# EAGLE board openSX70-FTDI-232RL-Basic-5V (EAGLE 9.1.1)
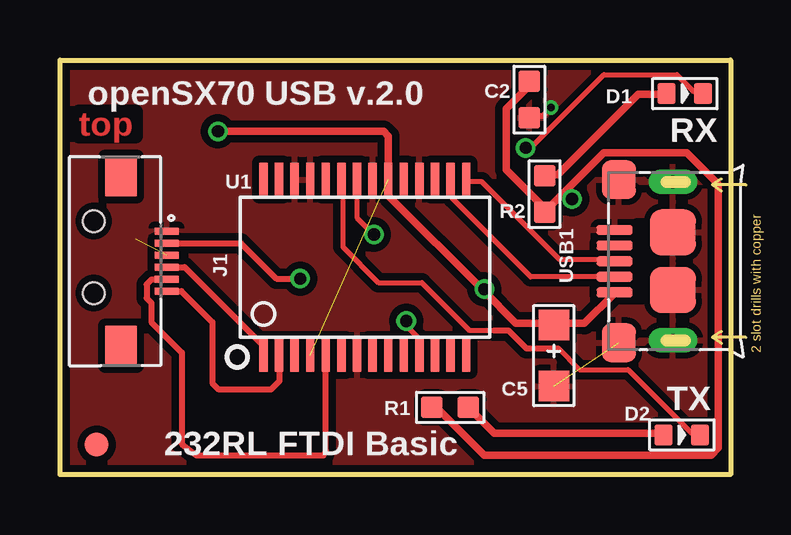
[diagram p0: board, top side]
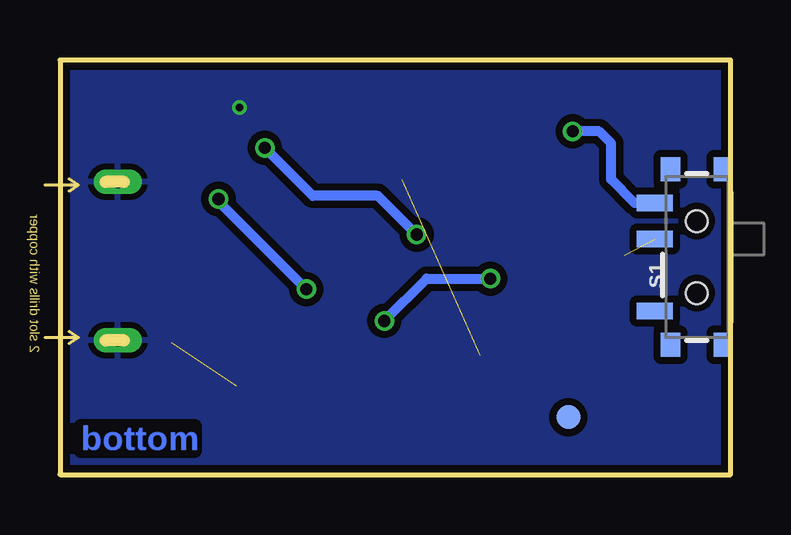
[diagram p1: board, bottom side, seen from below]

Size 27.94 x 17.27 mm. Coordinates in mm from the lower left corner, seen from the top.
Outline: 0,17.27 27.94,17.27 27.94,0 0,0 0,17.27
Copper layers (1*16): Top 0.035mm / dielectric 1.5mm / Bottom 0.035mm
Design rules "SeeedStudio_2layer_DRU_no_angle_20140221": minimum track width 6mil, minimum drill 12mil, track to track 6mil, track to pad 6mil, pad to pad 6mil, via to via 6mil, smd to smd 0mil, copper to edge 10mil, drill to drill 10mil, minimum pad ring 10mil, minimum via ring 6mil, stop-mask expansion 2mil, vias tented up to drill 100mil, thermal gap 10mil
Net classes: 0 default: width 0.203 mm; 1 power: width 0.254 mm

## Footprints (pad centres in the part's own frame; a part is rotated, then mirrored left to right if it is on the bottom)
C0603 = smd 0.889 x 0.889: 1 0,0.762; 2 0,-0.762
AVX-A = smd 1.27 x 1.27: + -1.27,0; - 1.27,0
LED-0603 = smd 0.762 x 0.889: + -0.762,0; - 0.762,0
687106183722 = smd 0.3 x 1: 1 -1.25,1.9; 2 -0.75,1.9; 3 -0.25,1.9; 4 0.25,1.9; 5 0.75,1.9; 6 1.25,1.9 | smd 1.65 x 1.3: Z1 -3.525,0; Z2 3.525,0
FIDUCIAL-1X2 = smd 1 x 1: 1 0,0
R0603 = smd 0.889 x 0.889: 1 0,0.762; 2 0,-0.762
SWITCH_SPST_SMD_A = smd 0.7 x 1.5: 1 -2.25,-1.75; 2 -0.75,-1.75; 3 2.25,-1.75 | smd 1 x 0.6: GND1 -3.65,1; GND3 3.65,1 | smd 1 x 0.8: GND2 -3.65,-1.1; GND4 3.65,-1.1 | hole 0.9: -1.5,0; 1.5,0
SSOP28DB = smd 0.348 x 1.397: 1 -4.225,-3.656; 2 -3.575,-3.656; 3 -2.925,-3.656; 4 -2.275,-3.656; 5 -1.625,-3.656; 6 -0.975,-3.656; 7 -0.325,-3.656; 8 0.325,-3.656; 9 0.975,-3.656; 10 1.625,-3.656; 11 2.275,-3.656; 12 2.925,-3.656; 13 3.575,-3.656; 14 4.225,-3.656; 15 4.225,3.656; 16 3.575,3.656; 17 2.925,3.656; 18 2.275,3.656; 19 1.625,3.656; 20 0.975,3.656; 21 0.325,3.656; 22 -0.325,3.656; 23 -0.975,3.656; 24 -1.625,3.656; 25 -2.275,3.656; 26 -2.925,3.656; 27 -3.575,3.656; 28 -4.225,3.656
MICRO-USB5+6P-SMD-0.65-B = smd 0.4 x 1.5: 1 -1.3,-0.25; 2 -0.65,-0.25; 3 0,-0.25; 4 0.65,-0.25; 5 1.3,-0.25 | smd 1.6 x 1.4: S1 -3.4,-0.427; S6 3.4,-0.427 | drill 0.508 pad 1.016 long: S2 -3.3,-2.675; S5 3.3,-2.675 | smd 1.9 x 1.9: S3 -1.2,-2.675; S4 1.2,-2.675

## Placement (x,y rotation side)
C2  100nf  [C0603]  19.56,15.62 0 top
C5  10uf  [AVX-A]  20.57,4.95 270 top
D1  GREEN-0603  [LED-0603]  26.03,15.88 0 top
D2  YELLOW-0603  [LED-0603]  25.91,1.65 0 top
FRAME1  FRAME-LETTER  [CREATIVE_COMMONS]  -4.5,-10.16 0 top  (outside the outline)
J1  687106183722  [687106183722]  2.54,8.89 270 top
JP3  FIDUCIAL1X2  [FIDUCIAL-1X2]  1.52,1.24 0 top
JP5  FIDUCIAL1X2  [FIDUCIAL-1X2]  6.76,2.39 0 bottom
R1  1K  [R0603]  16.26,2.79 270 top
R2  1K  [R0603]  20.19,11.68 0 top
S1  [SWITCH_SPST_SMD_A]  1.41,9.06 270 bottom
U1  FT232RLSSOP  [SSOP28DB]  12.7,8.64 0 top
USB1  10118193-0001LF  [MICRO-USB5+6P-SMD-0.65-B]  22.86,8.89 90 top

## Library data of the parts
C2 = openSX70_PATHFINDER_V5.5-SEEED_20180522; MPN: CC0603KRX7R9BB104
C5 = Seeed-Capacitor-2016; MPN: TAJA106K016RNJ
D1 = Seeed-LED; MPN: 19-217-G7C-AN1P2-3T
D2 = Seeed-LED-2016; MPN: 19-217-Y5C-AM1N1VY-3T
FRAME1 = SparkFun-Aesthetics
J1 = openSX70_PATHFINDER_V5.5-SEEED_20180522; AVAILABILITY: Good; DESCRIPTION: CONN FFC BTM 6POS 0.5MM SMD R/A; MF: Wurth Electronics; MP: 687106183722; PACKAGE: None; PRICE: 1.21 USD
JP3 JP5 U1 = SparkFun
R1 R2 = openSX70_PATHFINDER_V5.5-SEEED_20180522; MPN: RC0603FR-071KL
S1 = SparkFun-Switches; PROD_ID: SWCH-10651; SF_SKU: COM-10860
USB1 = Seeed-Connector -2016; MPN: 10118193-0001LF

## Nets
5V: C2.1 C5.+ R1.2 R2.2 S1.1 USB1.1
CTS: J1.2 U1.11
DTR: J1.6 U1.2
GND [power]: C2.2 C5.- J1.1 U1.7 U1.18 U1.21 U1.25 U1.26 USB1.5 USB1.S1 USB1.S2 USB1.S3 USB1.S4 USB1.S5 USB1.S6
N$1: D2.+ R1.1
N$2: D1.+ R2.1
N$3: U1.16 USB1.2
N$4: U1.4 U1.20
N$5: J1.3 S1.2
RXI: J1.5 U1.5
RXLED: D1.- U1.22
TXLED: D2.- U1.23
TXO: J1.4 U1.1
USB_D+: U1.15 USB1.3

## Tracks (layer width: path | path; a pad name or v marks a point on that pad's centre or on a via)
5V  (via drill 0.51)
  Top 0.203: 20.62,6.3 C5.+ 20.52,6.3 | 23.06,7.52 USB1.1 | 13.72,11.58 13.72,12.19 | 15.75,2.74 15.54,2.74 R1.2 | 20.22,10.97 R2.2 20.22,11.07 | 19.51,16.15 19.51,16.36 C2.1 | 21.03,11.79 v21.34,11.48 | v17.68,7.72 17.63,7.67
  Top 0.254: 13.68,12.23 13.72,12.19
  Top 0.305: 20.62,6.3 21.84,6.3 23.06,7.52 | 13.72,11.58 17.63,7.67 19,6.3 20.52,6.3 | 15.75,2.74 17.68,0.81 27.13,0.81 27.43,1.12 27.43,12.09 26.11,13.41 22.66,13.41 21.03,11.79 20.22,10.97 | 19.51,16.15 18.59,15.24 18.59,12.7 20.22,11.07 | v6.58,14.3 13.48,14.3 13.68,14.1 13.68,12.23
  Bottom 0.305: S1.1 3.99,11.31 | 21.34,11.38 v21.34,11.48
  Bottom 0.406: v6.58,14.3 5.48,14.3 4.98,13.8 4.98,12.3 3.99,11.31 | v17.68,7.72 21.34,11.38
CTS  (via drill 0.51)
  Top 0.203: v14.43,6.4 14.43,6.2 14.94,5.69 14.94,5.08 U1.11
  Top 0.254: J1.2 7.54,9.64 9.02,8.16 v10.01,8.16
  Bottom 0.406: v10.01,8.16 12.66,8.16 v14.43,6.4
DTR
  Top 0.254: U1.2 arc-90 9.14,4.96 9.14,3.89 8.79,3.54 6.62,3.54 6.35,3.81 6.35,6.35 5.06,7.64 J1.6
GND  (via drill 0.3)  (1 unrouted)
  Top 0.254: v20.46,15.29 20.1,14.94 19.57,14.94 C2.2
  pour Bottom (isolate 0.305): 0,-0.03 0,17.3 27.94,17.3 27.94,-0.03
  pour Top (isolate 0.305): 0,-0.03 0,17.3 27.94,17.3 27.94,-0.03
N$1
  Top 0.203: 25.09,1.73 D2.+
  Top 0.305: 25.09,1.73 18.09,1.73 R1.1
N$2
  Top 0.203: 20.22,12.5 R2.1 | 25.2,15.85 D1.+
  Top 0.305: 20.22,12.5 20.73,12.5 24.09,15.85 25.2,15.85
N$3
  Top 0.203: U1.16 16.36,12.19 16.36,11.48 19.61,8.23 USB1.2
N$4  (1 unrouted)
N$5  (1 unrouted)
RXI
  Top 0.254: J1.5 4.42,8.12 3.8,8.12 3.61,7.93 3.61,7.35 3.81,7.15 3.81,6.35 5.08,5.08 5.08,1.27 5.68,0.8 10.98,0.8 11.08,1 11.07,1 U1.5
RXLED  (via drill 0.51)
  Top 0.203: v19.41,13.61 19.61,13.61 22.66,16.66 25.7,16.66 26.42,15.95 26.72,15.95 D1.- | U1.22 12.39,12.29 12.39,10.69 v13.08,10
  Bottom 0.406: v13.08,10 14.7,11.62 17.41,11.62 v19.41,13.61
TXLED
  Top 0.203: 18.08,6 17.08,6 15.08,8 13.27,8 11.79,9.48 11.79,12.19 U1.23 | D2.- 26.62,1.73 26.31,1.73 23.67,4.37 21.64,4.37 20.75,5.26
  Top 0.254: 18.08,6 18.69,6 19.43,5.26 20.75,5.26
TXO
  Top 0.254: J1.4 5.2,8.64 8.47,5.36 U1.1
USB_D+
  Top 0.203: U1.15 16.97,12.19 17.58,12.19 20.83,8.94 23.06,8.94 USB1.3

## Text on the board
Top: top
Bottom: bottom
tPlace: openSX70 USB v.2.0 | RX | TX | 232RL FTDI Basic
Document: P. Dokter, T. Klopfenstein